# EAGLE board YOTSUBA_+Y+Z_ver.1.2 (EAGLE 9.6.2)
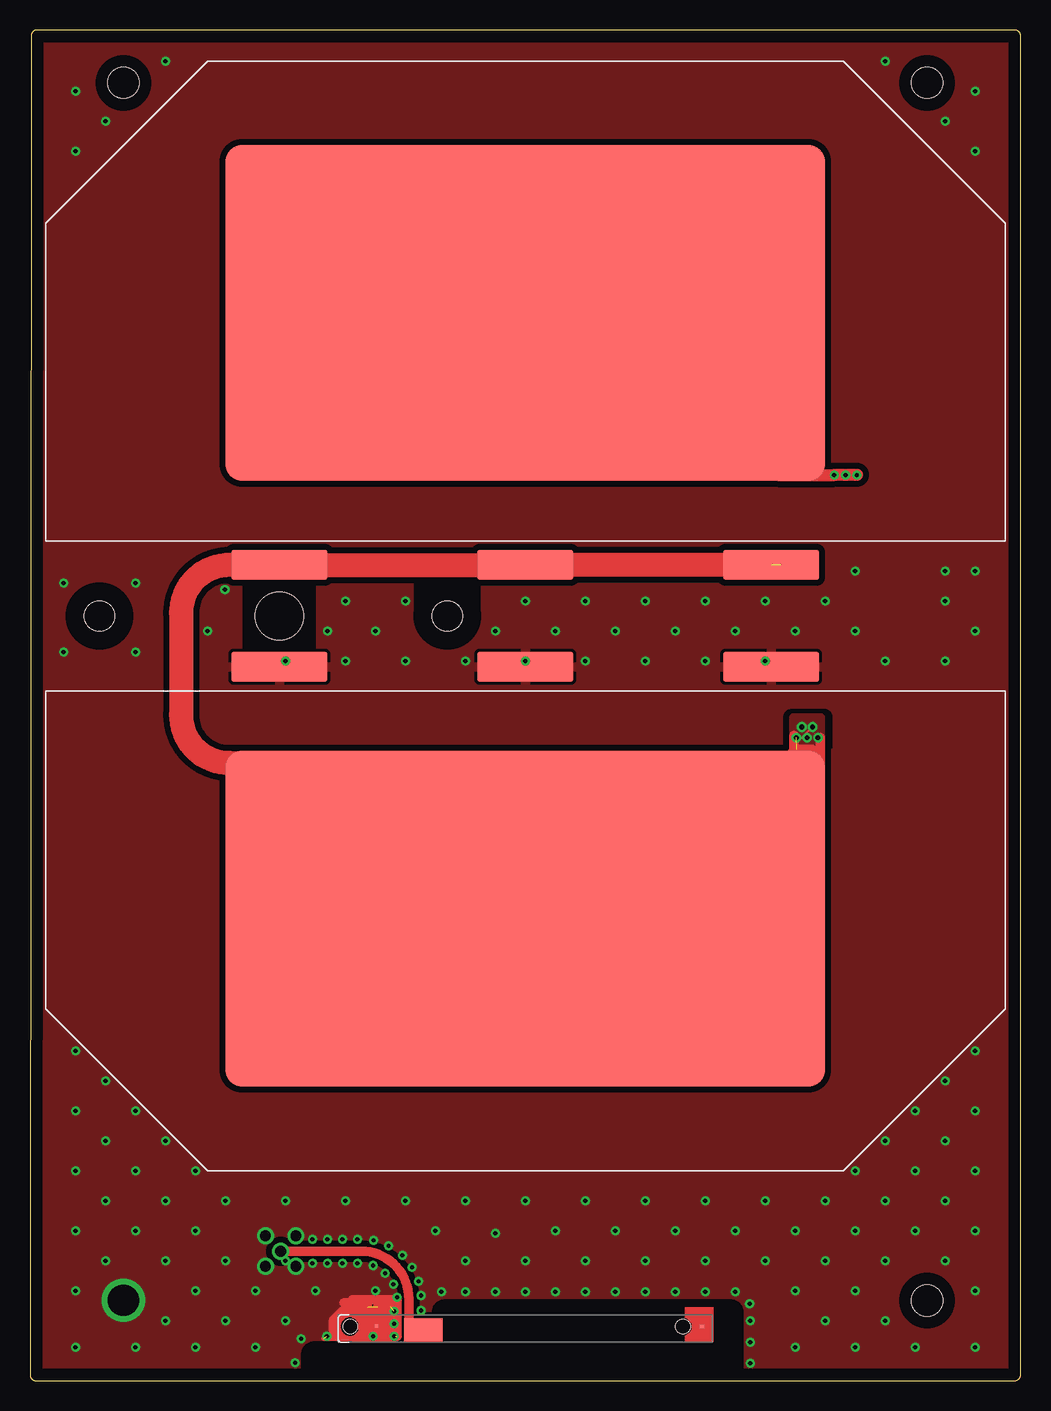
[diagram p0: board, top side]
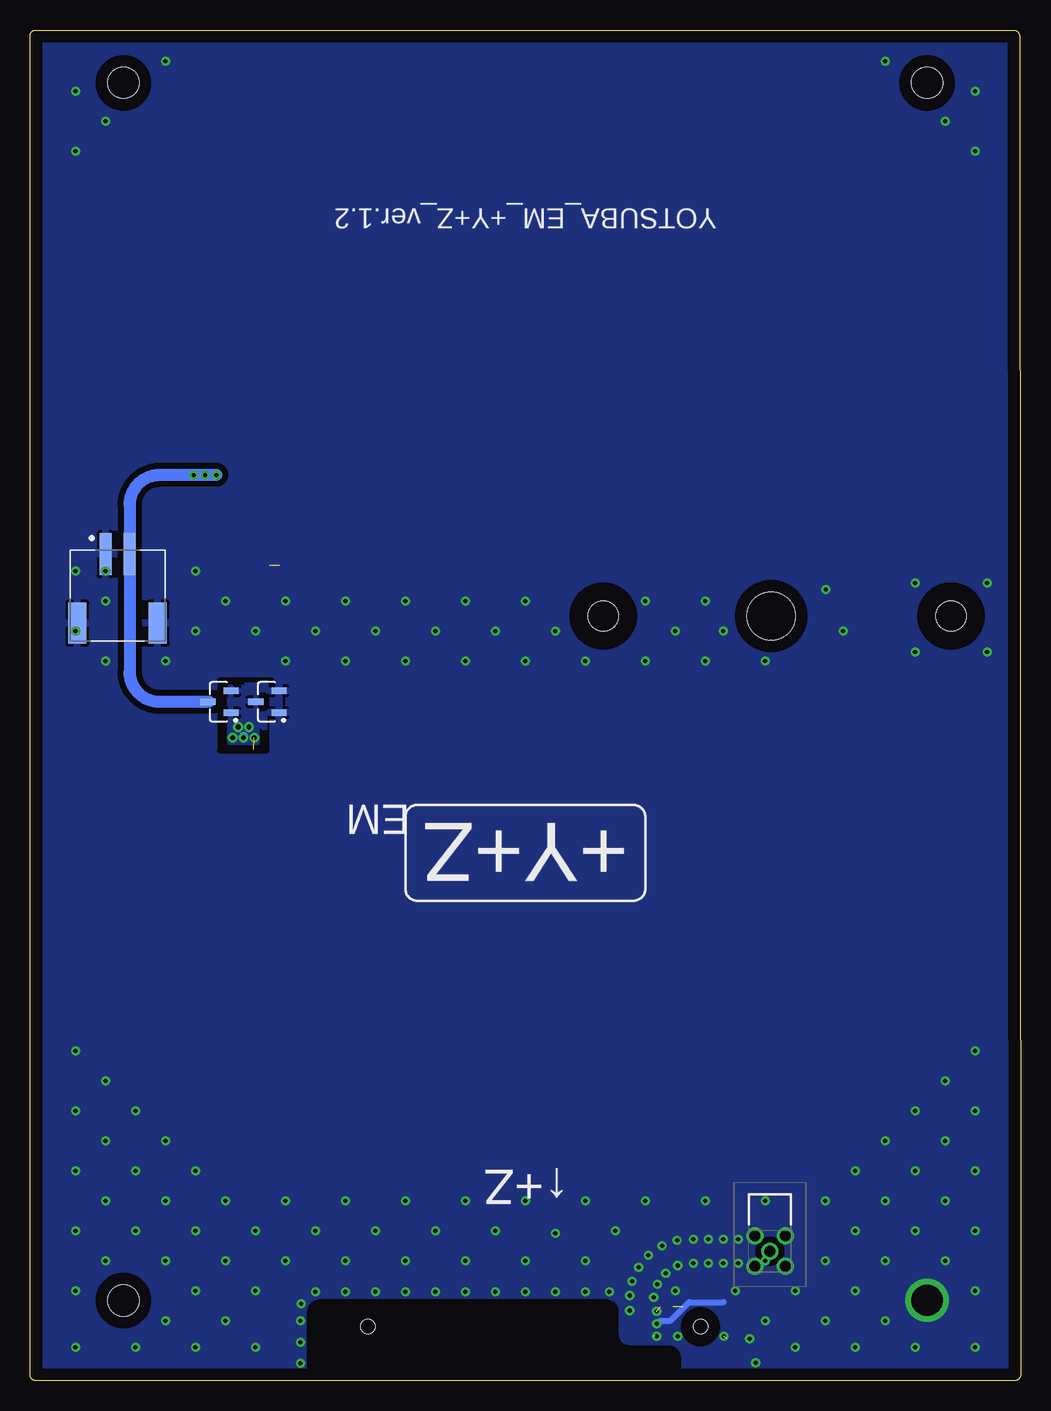
[diagram p1: board, bottom side, seen from below]

Size 82.6 x 112.6 mm. Coordinates in mm from the lower left corner, seen from the top.
Outline: 0.5,0 82.1,0 arc90 82.6,0.5 82.6,112.1 arc90 82.1,112.6 0.6,112.6 arc90 0.1,112.1 0,0.5 arc90 0.5,0
Copper layers (1*16): Top 0.035mm / dielectric 1.2mm / Bottom 0.035mm
Design rules "default *": minimum track width 6mil, minimum drill 0.35mm, track to track 6mil, track to pad 6mil, pad to pad 6mil, via to via 6mil, smd to smd 6mil, copper to edge 40mil, drill to drill 6mil, minimum pad ring 10mil, minimum via ring 8mil, stop-mask expansion 4mil, vias tented up to drill 30mil, thermal gap 10mil
Net classes: 2 GND: clearance 0.5 mm to class 0, clearance 0.21 mm to class 1, clearance 0.5 mm
Holes 2.6 mm at 74.8,6.7 7.8,108.2 74.8,108.2
Holes 4 mm at 20.8,63.75
Holes 2.5 mm at 5.8,63.75 34.8,63.75
tRestrict: area 3.1,61 to 8.5,66.5; area 32.1,61 to 37.5,66.5; 17 lines
bRestrict: area 3.1,61 to 8.5,66.5; area 32.1,61 to 37.5,66.5; 14 lines

## Footprints (pad centres in the part's own frame; a part is rotated, then mirrored left to right if it is on the bottom)
ANTENNA_1002427 = smd 3.2 x 1.9: 1 24.1,-1.05 | smd 0.3 x 0.3: 2 28.02,-1.375; 3 0.875,-1.325 | hole 1.2: 2.46,-1.3; 30.2,-1.3
MMCXLRPC140 = drill 0.9 pad 1.4: 1 0,0; 2 -1.27,-1.27; 3 1.27,-1.27; 4 1.27,1.27; 5 -1.27,1.27
JST_S2B-PH-SM4-TB(LF)(SN) = smd 1 x 3.5: 1 -1,0; 2 1,0 | smd 1.5 x 3.4: S1 -3.35,-5.75; S2 3.35,-5.75
SOT23_BAT_DIO = smd 0.568 x 1.259: 1 -0.915,-0.965; 2 0.915,-0.965; 3 0,0.965
SOLAR_3G30A = smd 50 x 28: +V 0,19 | smd 8 x 2.5: -V@1 -20.5,-2; -V@2 20.5,-2; -V@3 0,-2

## Placement (x,y rotation side)
ANT1  1002427  [ANTENNA_1002427]  56.9,3.2 180 top
J1  MMCX-LR-PC-1_40_  [MMCXLRPC140]  20.9,10.8 90 bottom
J2  S2B-PH-SM4-TB(LF)(SN)  [JST_S2B-PH-SM4-TB(LF)(SN)]  75.3,68.9 0 bottom
U1  BAT1000-7-F  [SOT23_BAT_DIO]  66.8,56.6 90 bottom
U2  BAT1000-7-F  [SOT23_BAT_DIO]  62.8,56.6 90 bottom
U$2  3G30A  [SOLAR_3G30A]  41.3,70 0 top
U$3  3G30A  [SOLAR_3G30A]  41.3,57.5 180 top

## Library data of the parts
ANT1 = 1002427; DESCRIPTION: 868MHz, 915MHz, 1.575GHz Beidou, GLONASS, GPS, ISM, LoRa, LPWAN, Sigfox Stamped Metal RF Antenna 868MHz, 915MHz, 1.561GHz ~ 1.602GHz 3dBi Solder Surface Mount; DIGI-KEY_PART_NUMBER: 478-1002427TR-ND; MF: Ethertronics/AVX; MP: 1002427; PACKAGE: None; PURCHASE-URL: https://pricing.snapeda.com/search/part/1002427/?ref=eda
J1 = MMCX-LR-PC-1_40_; DESCRIPTION: RF Connectors / Coaxial Connectors MINI PUSH-ON CONN RECEPT RA; HEIGHT: 3.95mm; MANUFACTURER_NAME: Hirose; MANUFACTURER_PART_NUMBER: MMCX-LR-PC-1(40); MOUSER_PART_NUMBER: 798-MMCX-LR-PC-1(40); MOUSER_PRICE-STOCK: https://www.mouser.co.uk/ProductDetail/Hirose-Connector/MMCX-LR-PC-140?qs=XQjbzJWzFPVvtPijmLd%2FXQ%3D%3D
J2 = S2B-PH-SM4-TB_LF__SN_; DESCRIPTION: Connector Header Surface Mount, Right Angle 2 position 0.079 (2.00mm); DIGI-KEY_PART_NUMBER: 455-1749-2-ND; MF: JST Sales; MP: S2B-PH-SM4-TB(LF)(SN); PACKAGE: None; PURCHASE-URL: https://pricing.snapeda.com/search/part/S2B-PH-SM4-TB(LF)(SN)/?ref=eda
U1 U2 = BAT1000; COPYRIGHT: Copyright (C) 2023 Ultra Librarian. All rights reserved.; DIGIKEY_PART_NUMBER_1: BAT1000-7FDITR-ND; DIGIKEY_PART_NUMBER_2: BAT1000-7FDICT-ND; DIGIKEY_PART_NUMBER_3: BAT1000-7FDIDKR-ND; MANUFACTURER_PART_NUMBER: BAT1000-7-F; MFR_NAME: Diodes Inc
U$2 U$3 = 3G30A_normal

## Nets
GND [GND]: ANT1.2 J1.2 J1.3 J1.4 J1.5 J2.1 J2.S1 J2.S2 U2.1 U2.2 U$3.-V@1 U$3.-V@2 U$3.-V@3
N$5: U1.1 U1.2 U2.3 U$2.-V@1 U$2.-V@2 U$2.-V@3 U$3.+V
N$6: J2.2 U1.3 U$2.+V
RF2 [ANTENNA]: ANT1.1 J1.1

## Tracks (layer width: path | path; a pad name or v marks a point on that pad's centre or on a via)
GND  (via drill 0.35, 2.6)  (4 unrouted)
  Top 0.2: 29.2,3.85 29.15,3.97
  Top 0.305: 29.15,4.31 29.15,3.97 29.15,3.5 28.94,3.5
  Top 0.4: 28.94,3.5 24.5,3.5 | 25.4,3.8 26,3.8
  Top 0.8: 30.59,4.72 30.59,6.75 26.9,6.75 26.9,6.5 | 26.9,6.5 26.2,6.5 | 26.9,6.5 26.9,5.7 26.1,5.7 | 30.59,4.72 30.59,3.71 30.6,3.7 | 30.05,6.15 29,6.15 | 28.15,6.15 27.1,6.15 | 30.59,4.72 28.88,4.72 ANT1.2 | 29.93,3.7 30.5,3.7
  Top 1: 25.4,5 25.4,3.8
  Top 1.016: 26.1,5.7 25.4,5
  Bottom 0.5: 30,5 29.2,5 27.66,6.54 24.78,6.54
  other vias: 34.3,7.4 78.8,27.5 76.3,25 73.8,22.5 78.8,22.5 76.3,20 71.3,20 68.8,17.5 73.8,17.5 78.8,17.5 71.3,15 76.3,15 78.8,12.5 78.8,7.5 73.8,12.5 68.8,12.5 61.3,10 66.3,10 71.3,10 68.8,7.5 63.8,7.5 63.8,2.8 66.3,5 71.3,5 68.8,2.8 73.8,2.8 78.8,2.8 46.3,10 41.3,10 38.8,12.3 36.3,10 33.8,12.5 36.3,15 31.3,15 16.3,10 48.8,12.5 51.3,15 13.8,17.5 8.8,17.5 11.3,20 6.3,20 8.8,22.5 6.3,25 3.8,22.5 3.8,27.5 18.8,2.8 13.8,2.8 8.8,2.8 11.3,5 3.8,2.8 3.8,7.5 7.8,6.7 3.8,17.5 13.8,7.5 11.3,10 36.3,7.4 41.3,7.4 46.3,7.4 51.3,7.4 56.3,7.4 60.05,1.45 22.1,1.5 38.8,7.4 43.8,7.4 48.8,7.4 53.8,7.4 58.8,7.4 60.05,5 60.05,3.2 24.75,3.7 61.3,60 76.3,60 78.8,62.5 71.3,60 76.3,65 78.8,67.5 8.8,60.75 8.8,66.5 2.8,66.5 3.8,107.5 6.3,105 11.3,110 71.3,110 78.8,102.5 78.8,107.5 43.8,12.5 22.6,3.5 60,6.4 26.3,15 21.3,15 21.3,10 13.8,12.5 16.3,15 11.3,15 8.8,12.5 6.3,15 3.8,12.5 6.3,10 3.8,102.5 76.3,105 14.8,62.5 24.8,62.5 28.8,62.5 26.3,65 31.3,65 31.3,60 26.3,60 36.3,60 41.3,60 38.8,62.5 41.3,65 43.8,62.5 46.3,65 48.8,62.5 46.3,60 51.3,60 53.8,62.5 51.3,65 56.3,65 58.8,62.5 56.3,60 61.3,65 63.8,62.5 66.3,65 68.8,62.5 68.8,67.5 76.3,67.5 16.25,65.95 41.3,15 46.3,15 56.3,10 51.3,10 53.8,12.5 56.3,15 58.8,12.5 61.3,15 63.8,12.5 66.3,15 76.3,10 16.3,5 18.8,7.5 21.3,5 23.8,7.5 28.8,7.5 23.55,9.8 24.8,9.8 26.05,9.8 27.3,9.8 23.55,11.8 24.8,11.8 26.05,11.8 27.3,11.8 30.35,4.75 30.3,8.05 28.6,3.7 28.6,9.6 29.6,8.95 32.6,5.85 30.35,3.7 32.6,7.1 30.6,6.95 30.35,5.8 28.65,11.7 29.9,11.25 31.05,10.45 31.85,9.45 32.4,8.3 2.8,60.75 21.3,60
  pour Top: -4.35,103.9 arc90 -4.6,103.65 -4.6,-4.85 arc90 -4.05,-5.4 88.9,-5.4 88.9,103.65 arc90 77.65,114.9 -1.35,114.9 -4.35,111.9
  pour Bottom: 89.6,119.7 -8.3,119.7 -8.3,-8.8 89.6,-8.8
N$5  (via drill 0.4)  (2 unrouted)
  Top 0.152: 63.7,51.75 63.08,51.13 | 63.08,51.13 62.97,51.02 53.82,51.02 U$3.+V | 63.08,51.13 63.08,52.33 v65.25,54.5
  Top 0.8: U$3.+V 65.9,38.5 | 63.7,53.6 v63.9,53.6 | v65.7,53.6 65.9,53.6 65.9,51.2 64.6,51.2 | 65.25,52.6 63.95,52.6 | 63.7,53.8 63.7,51.75 63.7,51.4
  Top 2: U$3.+V 41.3,51.5 16.6,51.5 arc-90 12.6,55.5 12.6,64 arc-90 16.6,68 U$2.-V@1 U$2.-V@3 62.6,68
  Bottom 0.8: v64.8,53.6 64.8,53.7
  other vias: 64.35,54.5
  pour Bottom: 66,53.2 63.6,53.2 63.6,57.8 66,57.8
  pour Top: 63.4,50.9 63.4,55.2 arc-90 63.7,55.5 65.9,55.5 arc-90 66.2,55.2 66.2,50.9
  pour Top: 63.4,50.95 63.4,55.25 arc-90 63.7,55.55 65.9,55.55 arc-90 66.2,55.25 66.2,50.95
  pour Top: 63.4,50.95 63.4,55.25 arc-90 63.7,55.55 65.9,55.55 arc-90 66.2,55.25 66.2,50.95
N$6  (via drill 0.35)
  Top 1: 52.45,89 U$2.+V | 61.6,78.1 62.35,78.1 62.35,75.5 v67.05,75.5 v68.95,75.5
  Top 2: U$2.+V 41.36,83.39 41.39,82.78 | 41.39,82.78 41.59,78.5 | 41.39,82.78 42.51,83.9 46.1,83.9 51.9,78.1 61.6,78.1
  Bottom 1: 67.7,56.6 U1.3 71.8,56.6 arc90 74.3,59.1 J2.2 74.3,73 arc90 71.8,75.5 v68.95,75.5 v68,75.5 v67.05,75.5
RF2
  Top 0.152: ANT1.1 32.17,4.25 31.92,4.49
  Top 0.8: ANT1.1 32.6,4.25 | ANT1.1 32.35,4.25 | J1.1 27.6,10.8 arc-90 31.6,6.8 31.6,4.25 ANT1.1
(copper drawn outside any net)
  shapes: Top circle x1

## Text on the board
bNames: YOTSUBA_EM_+Y+Z_ver.1.2 | EM | +Y+Z | ↑+Z